# Altium PCB Encoder_MA600.PcbDoc
Units mm, origin at the board's own origin, x right, y up, seen from the top; angles counter-clockwise.
Board outline 18.4 x 18.4 mm, 2 copper layers (Top Layer, Bottom Layer), stack 0.8 mm thick; 5 components, 9 nets, 40 pads, 12 vias.
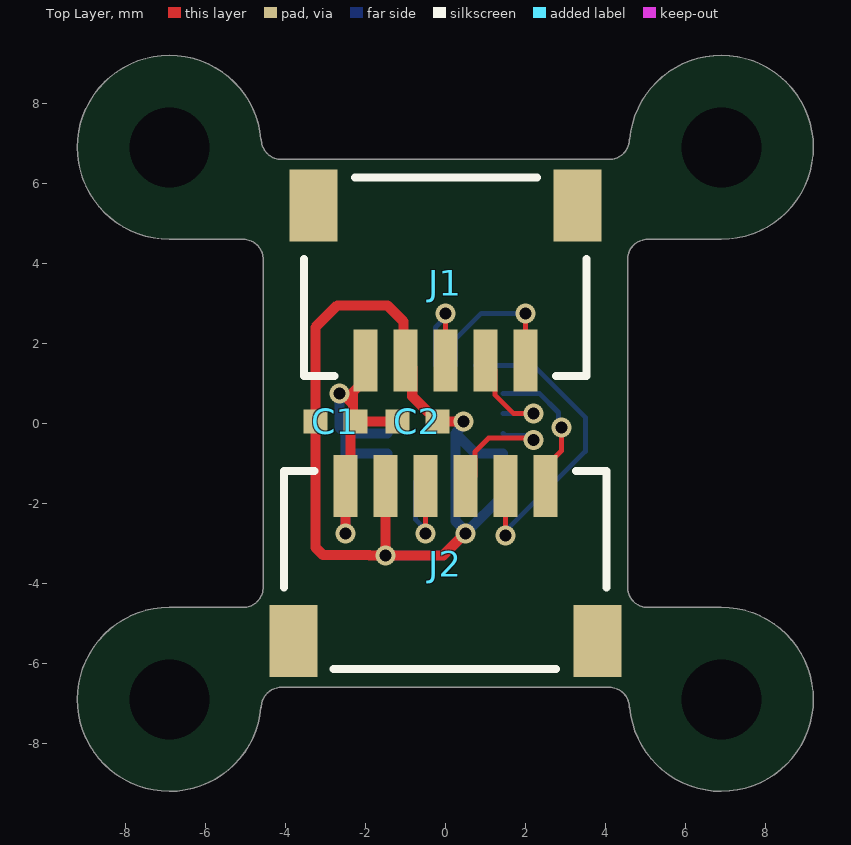
[diagram p0: Top Layer view]
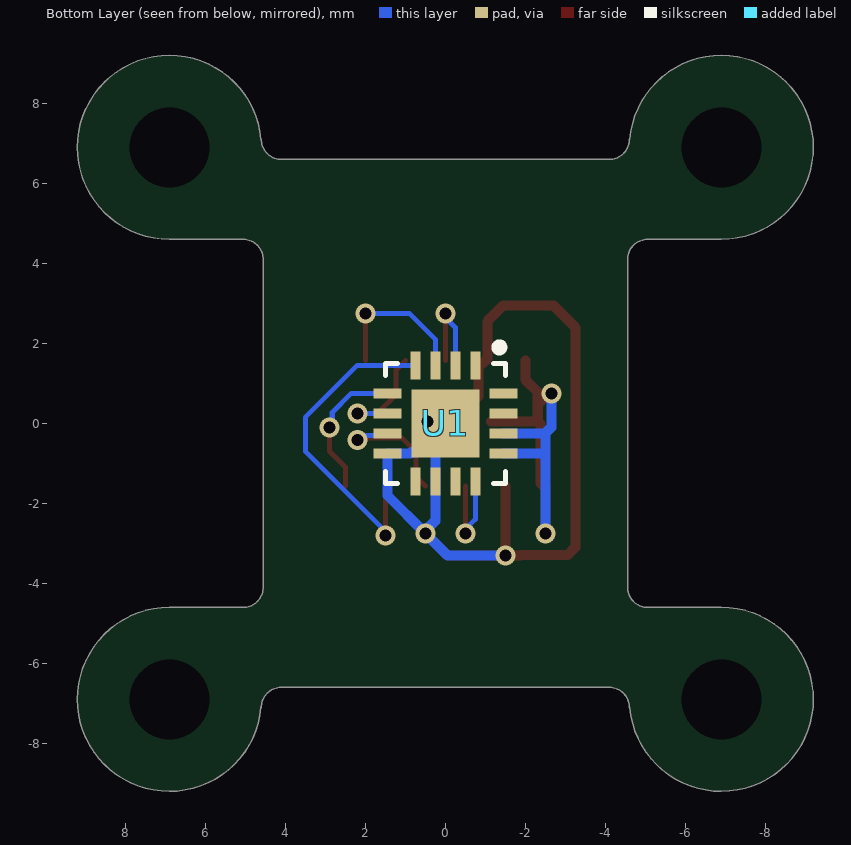
[diagram p1: Bottom Layer view, seen from below]
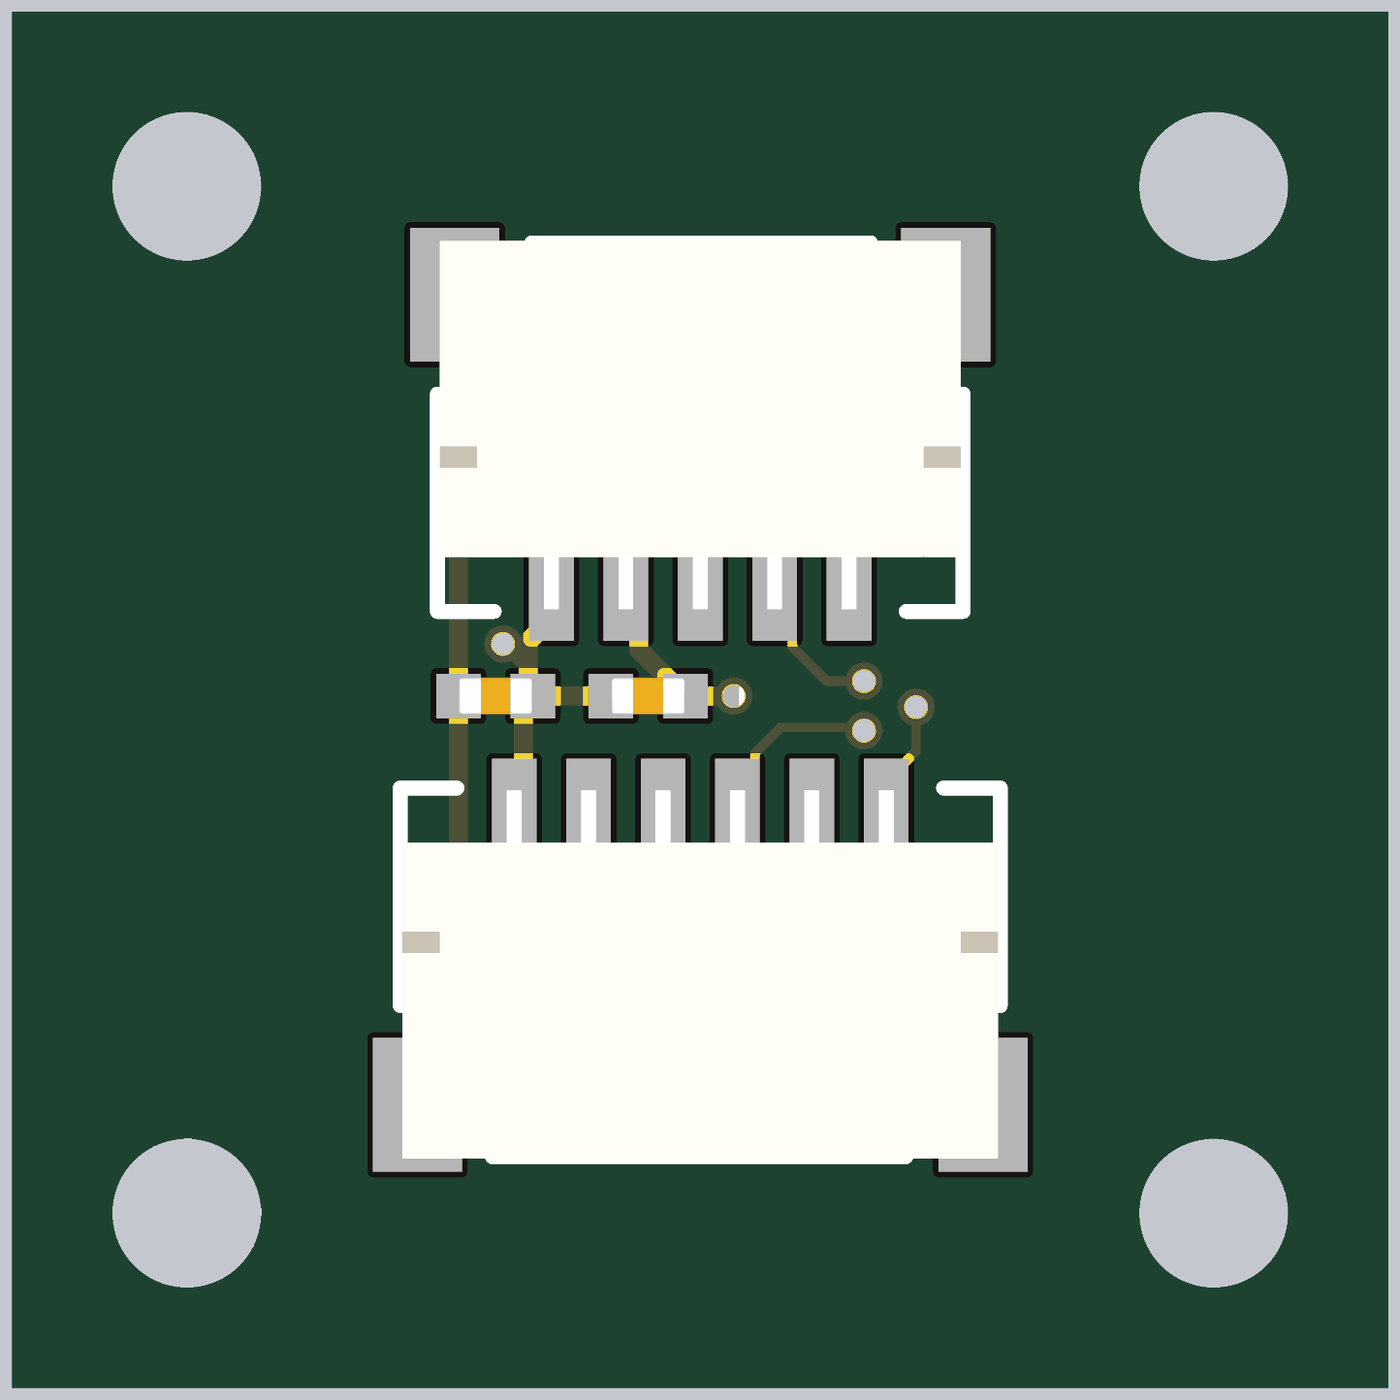
[diagram p2: 3D render of the assembled board from above, using the file's embedded part models]

## Layer stack, top to bottom
Top Solder: solder mask 0.01, Solder Resist, Dk 3.5
Top Layer: signal copper 0.035
Dielectric 1: dielectric 0.73, FR-4, Dk 4.8
Bottom Layer: signal copper 0.035
Bottom Solder: solder mask 0.01, Solder Resist, Dk 3.5

## Board outline
-4.609,-7.104 cw(c-6.9,-6.9) -6.9,-4.6 -5.061,-4.6 -5.05,-4.6 ccw(c-5.055,-4.1) -4.555,-4.095 -4.555,4.095 ccw(c-5.055,4.1) -5.05,4.6 -5.061,4.6 -6.9,4.6 cw(c-6.9,6.9) -4.609,7.104 -4.6,7.105 ccw(c-4.1,7.1) -4.105,6.6 4.105,6.6 ccw(c4.1,7.1) 4.6,7.105 4.609,7.104 cw(c6.9,6.9) 6.9,4.6 5.061,4.6 5.05,4.6 ccw(c5.055,4.1) 4.555,4.095 4.555,-4.095 ccw(c5.055,-4.1) 5.05,-4.6 5.061,-4.6 6.9,-4.6 cw(c6.9,-6.9) 4.609,-7.104 4.6,-7.105 ccw(c4.1,-7.1) 4.105,-6.6 -4.105,-6.6 ccw(c-4.1,-7.1)

## Design rules (kind name [scope] priority, off if disabled: settings)
BoardOutlineClearance [All] p1: gap=0.254 ignorepadtopadclearanceinfootprint=FALSE except(0: Arc-SplitContinuation Track-SplitContinuation SMDPad-SplitContinuation THPad-SplitContinuation Via-SplitContinuation Fill-SplitContinuation Poly-SplitContinuation Region-SplitContinuation Text-SplitContinuation)
Clearance [All] p1: gap=0.128 ignorepadtopadclearanceinfootprint=FALSE
PlaneConnect [All] p1: pad.planeconnectstyle=Relief pad.reliefexpansion=0.508 pad.reliefentries=4 pad.reliefconductorwidth=0.254 pad.reliefairgap=0.254 via.planeconnectstyle=Direct via.reliefexpansion=0.508 via.reliefentries=4 via.reliefconductorwidth=0.254 via.reliefairgap=0.254
PolygonConnect [All] p1: thpad.connectstyle=Relief thpad.reliefconductorwidth=0.254 thpad.reliefentries=4 thpad.polygonreliefangle="90 Angle" thpad.airgapwidth=0.254 smdpad.connectstyle=Relief smdpad.reliefconductorwidth=0.254 smdpad.reliefentries=4 smdpad.polygonreliefangle="90 Angle" smdpad.airgapwidth=0.254 via.connectstyle=Direct via.reliefconductorwidth=0.254 via.reliefentries=4 via.polygonreliefangle="90 Angle" via.airgapwidth=0.254
RoutingVias [All] p1: holewidth=0.3 width=0.5 viastyle="Through Hole" minholewidth=0.3 minwidth=0.5 maxholewidth=0.7 maxwidth=1.27
SolderMaskExpansion [All] p1: expansion=0.075 istentingtop=FALSE
SupplyNets "Schematic Supply Nets_1" [InNet('GND')] p1: voltage=0.000
SupplyNets "Schematic Supply Nets" [InNet('VCC')] p2: voltage=0.000
Width [All] p1: maxlimit=0.254 minlimit=0.127 preferedwidth=0.254
29 further rules are at their usual default settings.

## Components (designator, comment, footprint, x,y, rotation, side; value= is the part's Value field where it differs from the comment)
C1 "GRT155R71H104KE01D" "Generic 0402 capacitor" -2.75,0.05 r0 top value=100nF
C2 "GRT155R71H104KE01D" "Generic 0402 capacitor" -0.7,0.05 r180 top value=100nF
J1 "SM05B-SRSS-TB(LF)(SN)" "JST SM05B-SRSS-TB" 0,3.6 r0 top
J2 "SM06B-SRSS-TB(LF)(SN)" "JST SM06B-SRSS-TB" 0,-3.6 r180 top
U1 "MA600" IC_MA702GQ-Z 0,0 r270 bottom

## Footprints (in the part's own frame and the unit in brackets; to place one, negate y for a bottom-side part, rotate by r counter-clockwise, add the part's x,y. Pads: shape width x height; smd on the part's side, far side on the other; paste and mask are expansions set on the pad)
"Generic 0402 capacitor" [mm] "Generic 0402 capacitor"
  rect 0.6x0.6 smd: 1(-0.5,0) 2(0.5,0)
  body extent -0.5,-0.25 0.5,0.25, height 0.5
IC_MA702GQ-Z [mm]
  rect 0.7x0.25 smd: 1(-1.45,0.75) 2(-1.45,0.25) 3(-1.45,-0.25) 4(-1.45,-0.75) 9(1.45,-0.75) 10(1.45,-0.25) 11(1.45,0.25) 12(1.45,0.75)
  rect 0.25x0.7 smd: 5(-0.75,-1.445) 6(-0.25,-1.445) 7(0.25,-1.445) 8(0.75,-1.445) 13(0.75,1.45) 14(0.25,1.45) 15(-0.25,1.45) 16(-0.75,1.45)
  rect 1.7x1.7 smd paste-0.328: 17(0,0)
  silkscreen extent -2,-1.5 1.5,1.5, body extent -1.5,-1.5 1.5,1.5, height 1
"JST SM05B-SRSS-TB" [mm] "1.0mm pitch/Disconnectable Crimp style connector"
  rect 0.6x1.55 smd: 1(-2,-2.032) 2(-1,-2.032) 3(0,-2.032) 4(1,-2.032) 5(2,-2.032)
  rect 1.2x1.8 smd: M(-3.3,1.843) M(3.3,1.843)
  silkscreen extent -3.53,-2.41 3.53,2.54, body extent -3.5,-2.38 3.5,2.57, height 2.95
"JST SM06B-SRSS-TB" [mm] "1.0mm pitch/Disconnectable Crimp style connector"
  rect 0.6x1.55 smd: 1(-2.5,-2.032) 2(-1.5,-2.032) 3(-0.5,-2.032) 4(0.5,-2.032) 5(1.5,-2.032) 6(2.5,-2.032)
  rect 1.2x1.8 smd: M(-3.8,1.843) M(3.8,1.843)
  silkscreen extent -4.03,-2.41 4.03,2.54, body extent -4,-2.38 4,2.57, height 2.95

## Part data
C1 C2: library part CMP-001-00084-12, "Ceramic Capacitor, Multilayer, Ceramic, 50V, 10% +Tol, 10% -Tol, X7R, 15% TC, 0.1uF, Surface Mount, 0402", Capacitor Type=Ceramic, Case/Package=0402, Max Operating Temperature=125°C, Min Operating Temperature=-55°C, Package Shape=Rectangular, Temperature Coefficient=X7R, Tolerance=10%, Voltage Rating=50V, AECQ=Yes, Dielectric Material=Ceramic, Mounting Technology="Surface Mount", Multilayer=Yes, Packaging="Tape and Reel", Pins=2, Reach SVHC Compliant=Yes, RoHS Compliant=Yes, Terminal Finish=Nickel, Termination=Wraparound
J1: "CONN HEADER SMD R/A 5POS 1MM", Current Rating (Amps)=0.7A, Insulation Color=Natural, Manufacturer="JST Sales America Inc.", Material Flammability Rating="UL94 V-0", Operating Temperature="-25°C ~ 85°C", Supplier Part Number 1=455-1805-1-ND, Voltage Rating=50V, ComponentLink1Description=Datasheet, ComponentLink1URL=http://www.jst-mfg.com/product/pdf/eng/eSH.pdf, ComponentLink2Description="DigiKey Link", ComponentLink2URL=http://digikey.com/product-detail/en/jst-sales-america-inc/SM05B-SRSS-TB-LF-SN/455-1805-1-ND/926876, Connector Type=Header, Contact Finish - Mating=Tin, Contact Finish - Post=Tin, Contact Material="Copper Alloy", Contact Shape=Square, Contact Type="Male Pin", Fastening Type=Push-Pull, Features="Solder Retention", Insulation Height="0.114\" (2.90mm)", Insulation Material="Polyamide (PA), Nylon", LastUpdated="1/12/2020 11:42:04 PM", Lifecycle Status=Active, Minimum Order=1, Mounting Type="Surface Mount, Right Angle", Number of Positions=5, Number of Positions Loaded=All, Number of Rows=1, Packaging=TapeAndReel, Part Number=SM05B-SRSS-TB(LF)(SN), Part Status=Active, PartId=63, Pitch - Mating="0.039\" (1.00mm)", Price=0.32, Series=SR, Shrouding="Shrouded - 4 Wall", Style="Board to Cable/Wire", Supplier 1=DigiKey, Termination=Solder
J2: "CONN HEADER SMD R/A 6POS 1MM", Current Rating (Amps)=0.7A, Insulation Color=Natural, Manufacturer="JST Sales America Inc.", Material Flammability Rating="UL94 V-0", Operating Temperature="-25°C ~ 85°C", Supplier Part Number 1=455-1806-1-ND, Voltage Rating=50V, ComponentLink1Description=Datasheet, ComponentLink1URL=http://www.jst-mfg.com/product/pdf/eng/eSH.pdf, ComponentLink2Description="DigiKey Link", ComponentLink2URL=http://digikey.com/product-detail/en/jst-sales-america-inc/SM06B-SRSS-TB-LF-SN/455-1806-1-ND/926877, Connector Type=Header, Contact Finish - Mating=Tin, Contact Finish - Post=Tin, Contact Material="Copper Alloy", Contact Shape=Square, Contact Type="Male Pin", Fastening Type=Push-Pull, Features="Solder Retention", Insulation Height="0.114\" (2.90mm)", Insulation Material="Polyamide (PA), Nylon", LastUpdated="1/12/2020 11:42:14 PM", Lifecycle Status=Active, Minimum Order=1, Mounting Type="Surface Mount, Right Angle", Number of Positions=6, Number of Positions Loaded=All, Number of Rows=1, Packaging=TapeAndReel, Part Number=SM06B-SRSS-TB(LF)(SN), Part Status=Active, PartId=64, Pitch - Mating="0.039\" (1.00mm)", Price=0.36, Series=SR, Shrouding="Shrouded - 4 Wall", Style="Board to Cable/Wire", Supplier 1=DigiKey, Termination=Solder
U1: "Hall effect encoder"

## Free pads (board coordinates)
  round 0 hole 2 unplated: 1(-6.9,-6.9) 1(-6.9,6.9) 1(6.9,-6.9) 1(6.9,6.9)

## Via types
v1: diameter 0.5, hole 0.3, Top Layer to Bottom Layer, tented both sides, 12 vias

## Nets (pads, with @x,y where several pads share a name; then routed paths per layer and width w, separated by ;. In a path a pad name is that pad's centre, name@x,y a point inside that pad or via, vN(x,y) a via of type N, cw(c..) or ccw(c..) an arc to the next point about the centre after c; other vN are vias at no path point)
A: J1.3 U1.2 | length 2.6
  Top Layer w0.127: J1.3 0,1.618 v1(0,2.75)
  Bottom Layer w0.127: U1.2 -0.25,2.399 0,2.649 v1(0,2.75)
B: J1.4 U1.6 | length 2.9
  Top Layer w0.127: J1.4 1.236,1.332 1.236,0.714 1.7,0.25 v1(2.2,0.25)
  Bottom Layer w0.127: U1.6 v1(2.2,0.25)
C\S\: J2.1 U1.5 | length 3.6
  Top Layer w0.127: J2.1 2.5,-1.093 2.9,-0.693 v1(2.9,-0.1)
  Bottom Layer w0.127: U1.5 2.35,0.75 2.829,0.271 2.829,-0.029 v1(2.9,-0.1)
GND: C1.1 C2.1 J1.2 J2.5 U1.8 U1.10 U1.17 | length 26.4
  Top Layer w0.254: J2.5 v1(-1.5,-3.3) ; v1(0.45,0.05) C2.1 -0.827,0.677 -0.827,1.395 -1.05,1.618 -1.05,2.55 -1.45,2.95 -2.7,2.95 -3.25,2.4 C1.1 -3.25,-3.1 -3.055,-3.295 -1.895,-3.295 -1.89,-3.3 v1(-1.5,-3.3) ; v1(0.5,-2.75) -0.05,-3.3 v1(-1.5,-3.3)
  Bottom Layer w0.254: v1(-1.5,-3.3) -0.05,-3.3 v1(0.5,-2.75) ; v1(0.45,0.05) 0.45,-0.05 U1.17@0.25,-0.25 ; U1.17@0.25,-0.25 0.723,-0.723 0.845,-0.723 0.872,-0.75 U1.8 1.445,-1.805 v1(0.5,-2.75) ; U1.17@0.25,-0.25 U1.10 0.25,-2.433 0.5,-2.683 v1(0.5,-2.75)
I: J1.5 U1.3 | length 3.9
  Top Layer w0.127: J1.5 2,1.618 v1(2,2.75)
  Bottom Layer w0.127: U1.3 0.25,2.1 0.9,2.75 v1(2,2.75)
MISO: J2.3 U1.7 | length 3.4
  Top Layer w0.127: J2.3 0.736,-1.332 0.736,-0.714 1.079,-0.371 2.156,-0.371 v1(2.2,-0.415)
  Bottom Layer w0.127: U1.7 1.496,-0.301 1.986,-0.301 2.099,-0.415 v1(2.2,-0.415)
MOSI: J2.2 U1.4 | length 8.3
  Top Layer w0.127: v1(1.5,-2.8) 1.5,-1.618 J2.2
  Bottom Layer w0.127: U1.4 2.2,1.45 3.5,0.15 3.5,-0.7 1.5,-2.7 v1(1.5,-2.8)
SCLK: J2.4 U1.12 | length 2.6
  Top Layer w0.127: v1(-0.5,-2.75) J2.4
  Bottom Layer w0.127: U1.12 -0.75,-2.399 -0.5,-2.649 v1(-0.5,-2.75)
VCC: C1.2 C2.2 J1.1 J2.6 U1.13 U1.14 | length 11.9
  Top Layer w0.254: v1(-2.65,0.75) -2.583,0.75 -2.383,0.55 -2.31,0.55 ; v1(-2.5,-2.75) J2.6 ; J2.6 -2.475,-1.593 -2.375,-1.493 -2.375,-0.015 C1.2@-2.31,0.05 ; C1.2 C1.2@-2.31,0.05 ; J1.1 -2,1.093 -2.31,0.783 -2.31,0.55 ; C2.2@-1.14,0.05 C1.2@-2.31,0.05 ; C1.2@-2.31,0.05 -2.31,0.55
  Bottom Layer w0.254: v1(-2.65,0.75) -2.65,-0.1 -2.5,-0.25 ; v1(-2.5,-2.75) -2.5,-0.75 ; U1.13 -2.5,-0.75 ; U1.14 -2.5,-0.25 ; -2.5,-0.75 -2.5,-0.25
pads on no net: J1.M J2.M U1.1 U1.9 U1.11 U1.15 U1.16

## Silkscreen, mask and mechanical layers (free items; w line width, h text height)
Board Outline:
  lines w0.1: -5.061,-4.6 -6.9,-4.6 ccw(c-6.9,-6.9) -4.609,-7.104 ; -5.061,4.6 -6.9,4.6 cw(c-6.9,6.9) -4.609,7.104 ; -5.05,-4.6 ccw(c-5.055,-4.1) -4.555,-4.095 -4.555,4.095 ccw(c-5.055,4.1) -5.05,4.6 ; -4.6,-7.105 cw(c-4.1,-7.1) -4.105,-6.6 4.105,-6.6 cw(c4.1,-7.1) 4.6,-7.105 ; -4.6,7.105 ccw(c-4.1,7.1) -4.105,6.6 4.105,6.6 ccw(c4.1,7.1) 4.6,7.105 ; 4.609,-7.104 ccw(c6.9,-6.9) 6.9,-4.6 5.061,-4.6 ; 4.609,7.104 cw(c6.9,6.9) 6.9,4.6 5.061,4.6 ; 5.05,-4.6 cw(c5.055,-4.1) 4.555,-4.095 4.555,4.095 cw(c5.055,4.1) 5.05,4.6